# Altium PCB PCB1.PcbDoc (part 2 of 2)
Units mil, origin at the board's own origin, x right, y up, seen from the top; angles counter-clockwise.
Board outline 5020 x 3185 mil, 4 copper layers (Top Layer, GND, VCC, Bottom Layer), stack 23.756 mil thick; 166 components, 117 nets, 551 pads, 495 vias.
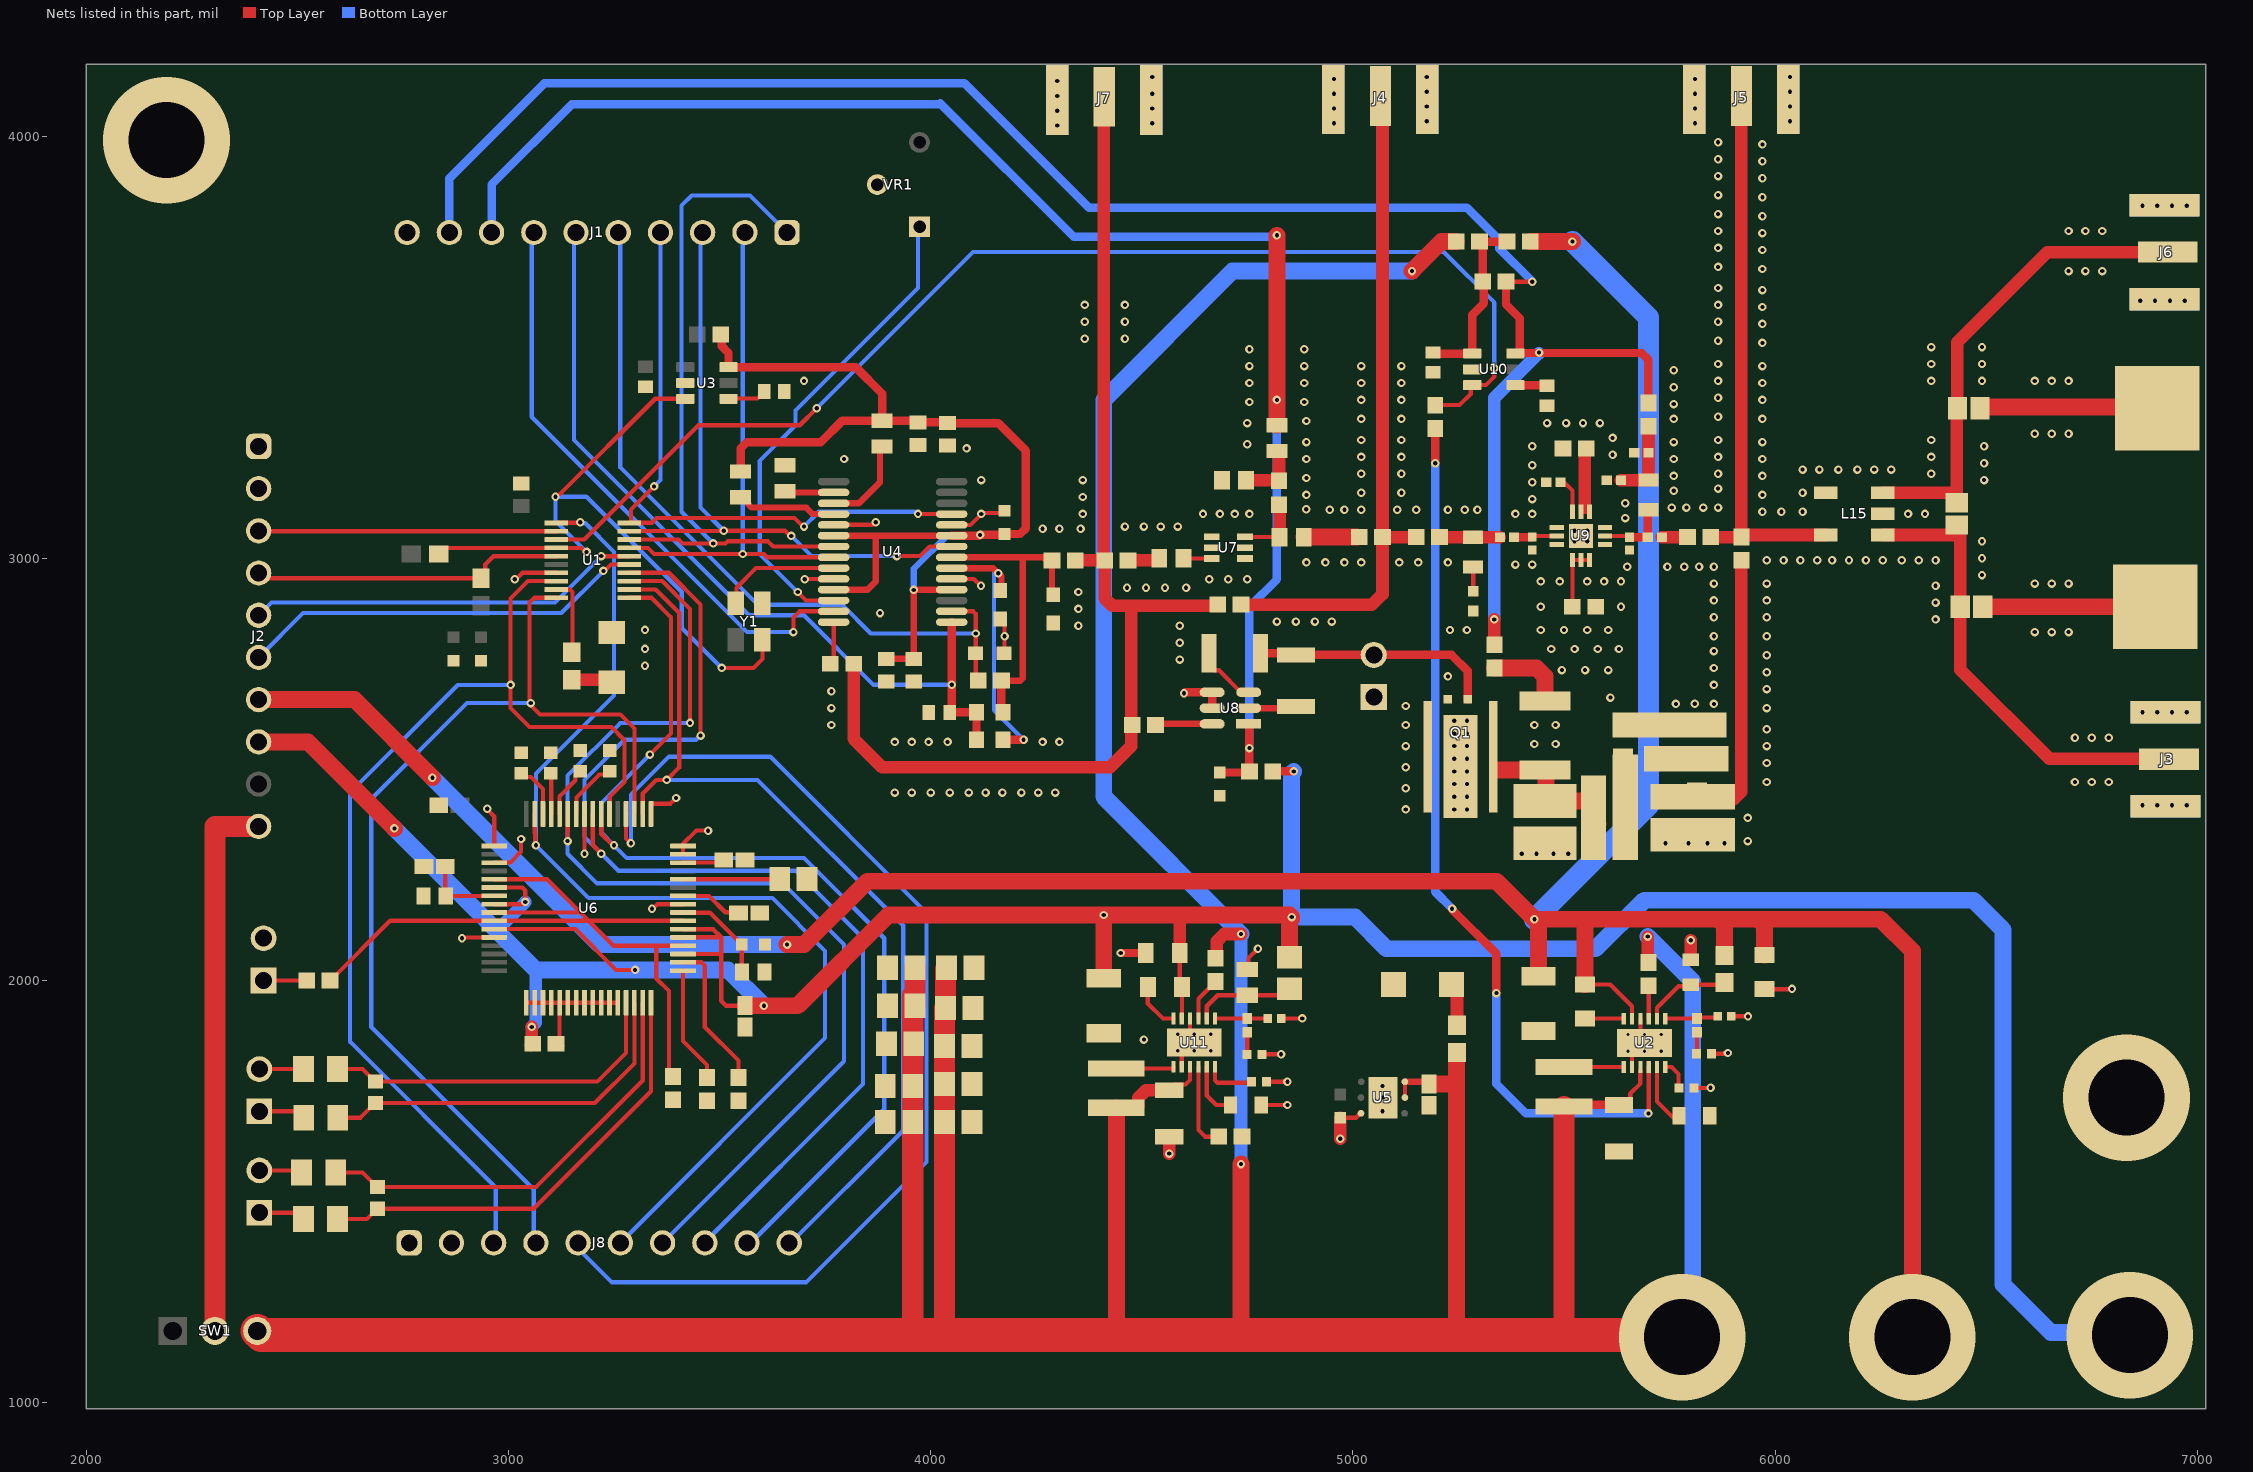
[diagram p2: the nets of this part, all layers, seen from the top]

## Via types
v1: diameter 20, hole 10, Top Layer to Bottom Layer, tented both sides, 477 vias
v2: diameter 19.68, hole 7.87, Top Layer to Bottom Layer, 12 vias
v3: diameter 300, hole 180, Top Layer to Bottom Layer, 6 vias

## Nets (pads, with @x,y where several pads share a name; then routed paths per layer and width w, separated by ;. In a path a pad name is that pad's centre, name@x,y a point inside that pad or via, vN(x,y) a via of type N, cw(c..) or ccw(c..) an arc to the next point about the centre after c; other vN are vias at no path point) (continued)
3V3DDS: C13.2 C14.2 C15.2 C16.2 C17.2 R12.1 R22.2 R23.2 U3.6 U4.6 U4.11 U4.18 U4.23 | length 2740.6
  Top Layer w10: C16.2@3960,2761.57 3958.44,2761.57 C16.2@3960,2763.13 ; v1(3960,2925) v1@3960.22,2925.22 ; U4.18@4049.55,2925.22 U4.18@4049.76,2925.43
  Top Layer w15: U4.11@3770.24,2925.43 3850.43,2925.43 3870,2945 3870,3053.39 ; U4.6@3770.24,3053.39 3870,3053.39 ; C13.2@3895,2761.57 C16.2@3958.44,2761.57 ; C16.2@3960,2763.13 v1(3960,2925) ; v1@3960.22,2925.22 U4.18@4049.55,2925.22 ; U4.23@4049.76,3053.39 3870,3053.39
  Top Layer w20: R12.1@3505.61,3527 3505.61,3502 3521.18,3486.42 U3.6@3521.18,3452.4 3822.6,3452.4 3885,3390 R23.2@3885,3325.59 ; R22.2@3550,3205.59 3550,3260 3565,3275 3740,3275 3790.59,3325.59 R23.2@3885,3325.59 ; U4.23@4049.76,3053.39 v1@4115.42,3053.39 ; v1(4117.13,3055.1) 4172.66,3055.1 C17.2@4175,3057.44 4211.87,3057.44 4225.23,3070.81 4225.23,3254.77 4160,3320 C14.2@4040,3320 4038.43,3321.57 C15.2@3970,3321.57 3965.98,3325.59 R23.2@3885,3325.59
  Bottom Layer w15: v1(3960,2925) 3960,2975 4040.1,3055.1 v1(4117.13,3055.1)
3V7PA: L10.2 R42.1 | length 186.6
  Top Layer w40: R42.1@5335.24,2740.04 5434.96,2740.04 5455,2720 L10.2@5455,2661.5
5V0: C25.1 C49.1 C50.1 C51.1 J2.8 R15.2 R25.2 R49.2 U6.19 U6.21 U6.22 U6.54 U6.56 U6.59 U11.11 | length 8041.5
  Top Layer w10: U6.59@2966.38,2121.57 3158.43,2121.57 3255,2025 v1(3300,2025) ; U6.56@2966.38,2180.63 3031.98,2180.63 3037.29,2185.94 v1(3040,2185.94) ; U6.54@2966.38,2220 3032.57,2220 3040,2212.57 v1(3040,2185.94) ; v1@3040,2185 v1(3040,2185.94) ; R25.2@3052.4,1845 R25.2@3057.4,1850 ; U6.19@3413.62,2062.52 3503.88,2062.52 ; U6.22@3413.62,2121.57 3414.13,2121.06 3485,2121.06 3503.88,2102.18 ; U6.21@3413.91,2102.18 3503.88,2102.18 ; C25.1@3560,1940 3515,1940 3503.88,1951.12 3503.88,2062.52 ; C51.1@4590,2065 4590,1990 C49.1@4595,1985 4595,1919.02 4594.69,1918.7 U11.11@4594.69,1910 ; 3503.88,2062.52 3503.88,2102.18
  Top Layer w20: R15.2@4810.2,2495 v1(4860,2495)
  Top Layer w30: R25.2@3052.59,1846.14 3055,1848.54 v1(3055,1890) ; C51.1@4590,2065 4590,2155
  Top Layer w40: J2.8@2408.51,2565 2525,2565 v1(2730,2360) ; C25.1@3560,1940 3685.18,1940 3900.18,2155 v1(4410,2155) ; C50.1@4410,2004.96 v1(4410,2155) ; R49.2@4850,2061.59 4850,2141.59 4855,2146.59 v1(4855,2150) 4850,2155 4590,2155 v1(4410,2155)
  Bottom Layer w10: 2975,2115 2975,2120.94
  Bottom Layer w30: 2975,2120.94 v1(3040,2185.94) ; v1(3055,1890) 3065,1900 3065,2025
  Bottom Layer w40: v1(2730,2360) 2975,2115 3065,2025 v1(3300,2025) 3520,2025 v1(3605,1940) ; v1(4860,2495) 4855,2490 v1(4855,2150) 5005,2150 5080,2075 5575,2075 5690,2190 6470,2190 6540,2120 6540,1280 6653.43,1166.57 6833.43,1166.57 v3(6840,1160)
12V0: C4.1 C5.1 C6.1 J2.7 R3.2 R9.2 U2.11 | length 7742.9
  Top Layer w10: C4.1@5550,1990.35 5609.65,1990.35 5661.26,1938.74 U2.11@5661.26,1909.17 ; 5555,2140 5560,2145 ; C6.1@5970.71,2064.29 C6.1@5975,2060
  Top Layer w40: J2.7@2408.51,2665 2635,2665 v1(2820,2480) ; v1(3660,2085) 3700,2085 3850,2235 5340,2235 v1(5430,2145) ; R9.2@5420.2,3750 v1(5520,3750) ; C5.1@5440,2009.96 5440,2135 v1(5430,2145) ; C4.1@5550,1990.35 5550,2135 5555,2140 ; R3.2@5880,2059.2 5880,2130 5865,2145 ; C6.1@5975,2060 5975,2130 5960,2145 ; v3(6325,1155) 6325,2070 6250,2145 5960,2145 ; v1(5430,2145) 5560,2145 5865,2145 ; 5865,2145 5960,2145
  Bottom Layer w40: v1(2820,2480) 3215,2085 v1(3660,2085)
  Bottom Layer w50: v1(5430,2145) 5700,2415 5700,3570 v1(5520,3750)
12V0PA: C36.2 C38.2 L3.2 R41.1 | length 192.1
  Top Layer w10: L3.2@5699.57,3185 L3.2@5700,3185.43
  Top Layer w30: C36.2@5635,3185 L3.2@5699.57,3185 ; L3.2@5700,3185.43 C38.2@5700,3250 R41.1@5700,3312.4
AFE_AGND: R56.1 R57.2 U6.20 U6.23 U6.53 U6.57 U6.58 | length 1911.6
  Top Layer w10: R56.1@2577.6,2000 2578.54,2000 2719.8,2141.26 U6.58@2966.38,2141.26 3190,2141.26 ; U6.57@2966.38,2160.94 3170.31,2160.94 ; U6.53@2966.38,2239.68 3091.57,2239.68 3170.31,2160.94 ; 3380,1794.01 3380,1975 3350,2005 3350,2082.2 ; U6.20@3413.62,2082.2 3350,2082.2 ; U6.23@3413.62,2141.26 3190,2141.26 ; 3170.31,2160.94 3190,2141.26 ; 3190,2141.26 3249.06,2082.2 3350,2082.2
AFE_RST: J8.5 U6.36 | length 2669.1
  Top Layer w10: U6.36@3279.09,2394.92 U6.36@3278.58,2394.41 3278.58,2336.42 v1(3290,2325)
  Bottom Layer w10: J8.5@3149.14,1380.88 3180.01,1350.01 3245,1285 3705,1285 3990,1570 3990,2160 3620,2530 3380,2530 3290,2440 v1(3290,2325)
"ClassE VG": J9.2 Q1.2 R39.2 R40.2 | length 575.5
  Top Layer w10: R39.2@4861.02,2775 R39.2@4865,2771.02
  Top Layer w20: R40.2@4781.02,2775 R39.2@4861.02,2775 ; R39.2@4865,2771.02 5233.98,2771.02 5271.93,2733.07 Q1.2@5271.93,2665.83
CS: J8.9 U1.11 U6.39 | length 2432.1
  Top Layer w10: U6.39@3219.53,2394.41 3219.76,2394.17 3219.76,2347.53 3247.29,2320 v1(3250,2320) ; U1.11@3286.5,2906.42 3338.58,2906.42 3385,2860 3385,2585 v1(3335,2535)
  Bottom Layer w10: v1(3335,2535) 3220,2420 3220,2350 v1(3250,2320) 3280,2290 3700,2290 3890,2100 3890,1695 J8.9@3558.44,1363.44
D7: J1.4 U1.20 U4.25 | length 1509
  Top Layer w10: U1.20@3286.5,3083.58 3287,3084.08 U1.20@3290,3084.08 ; v1(3345,3170) 3290,3115 U1.20@3290,3084.08 ; v1@3699.61,3075 3697.72,3075 3677.72,3095 3350.92,3095 3340,3084.08 U1.20@3290,3084.08 ; v1(3970,3105) 3970.22,3104.78 4049.55,3104.78 U4.25@4049.76,3104.57
  Bottom Layer w10: v1(3345,3170) 3360,3185 J1.4@3360,3771.49 ; v1(3700,3075) 3735,3110 3962.29,3110 3967.29,3105 v1(3970,3105)
DDS_OUT: R16.2 R17.1 R19.1 R21.2 U4.21 | length 730.7
  Top Layer w10: R19.1@4167.6,2638.89 R19.1@4171.5,2635
  Top Layer w15: U4.21@4049.76,3002.2 4217.8,3002.2 ; R21.2@4167.6,2710 4211.94,2710 4217.8,2715.86 4217.8,3002.2 ; R16.2@4275,2993.42 4266.21,3002.2 4217.8,3002.2 ; R17.1@4282.95,2910.59 4287.4,2915.04 R16.2@4287.4,2995
  Top Layer w20: R19.1@4167.6,2638.89 R21.2@4167.6,2710
DDS_OUTB: R18.1 R20.1 U4.20 | length 637.6
  Top Layer w15: U4.20@4049.76,2976.61 4148.39,2976.61 v1@4160.23,2964.77 ; v1(4160,2964.41) 4167.69,2956.71 R18.1@4167.69,2917.9
  Top Layer w20: R20.1@4171.5,2570 v1(4220,2570)
  Bottom Layer w10: 4150,2965 4150,2640 v1(4220,2570)
DDS_RST: J1.3 U1.19 U4.22 | length 1522.1
  Top Layer w10: U1.19@3286.5,3063.9 3287,3064.4 3509.4,3064.4 v1(3510,3065) 3655.09,3065 3667.29,3052.8 v1(3670,3052.8) ; v1(3920,3005) 3975,3005 3997.8,3027.8 U4.22@4049.76,3027.8
  Bottom Layer w10: J1.3@3455,3766.3 3455,3120 v1(3510,3065) ; v1(3670,3052.8) 3717.8,3005 v1(3920,3005)
DDS_WCLK: J1.1 U1.18 U4.7 | length 1624.4
  Top Layer w10: U1.18@3286.5,3044.21 3403.08,3044.21 3412.29,3035 3513.85,3035 3518.85,3040 3615,3040 3627.2,3027.8 U4.7@3770.24,3027.8
  Bottom Layer w10: 3410,3780.8 3410,3785.02 3410,3835 3434.11,3859.11 3572.39,3859.11 J1.1@3660,3771.49 ; 3410,3783.18 3410,3110 v1(3485,3035)
DRDY: J8.6 U1.1 U6.47 | length 2708.8
  Top Layer w10: U6.47@3062.05,2394.41 3062.05,2348.98 3063.6,2347.43 3063.6,2321.4 v1(3065,2320) ; U1.1@3113.5,3083.58 3114,3084.08 3169.08,3084.08 v1(3170,3085)
  Bottom Layer w10: v1(3170,3085) 3171.91,3083.09 3181.91,3083.09 3250,3015 3250,2675 3065,2490 v1(3065,2320) 3190,2195 3625,2195 3750,2070 3750,1863.51 J8.6@3254.72,1368.22
"Electrode 1": L14.2 pad.2@6900,2885 | length 353.8
  Top Layer w40: L14.2@6488.88,2882.28 L14.2@6491.61,2885 pad.2@6841.55,2885
"Electrode 2": L17.1 pad.2@6905,3355 | length 349.9
  Top Layer w40: L17.1@6497.73,3357.72 pad.2@6847.67,3357.72
FQ_UD: J1.2 U1.17 U4.8 | length 1254.5
  Top Layer w10: U1.17@3286.5,3024.53 3330.47,3024.53 3345,3010 3605,3010 3612.8,3002.2 U4.8@3770.24,3002.2
  Bottom Layer w10: v1(3555,3010) J1.2@3555,3771.49
GND: C1.1 C2.1 C3.1 C5.2 C6.2 C7.1 C9.2 C10.2 C11.1 C12.1 C13.1 C14.1 C15.1 C16.1 C17.1 C18.2 C19.2 C20.1 C21.2 C22.2 C25.2 C26.2 C27.2 C28.2 C29.1 C30.1 C31.2 C32.2 C35.2 C36.1 C37.1 C38.1 C41.1 C42.1 C43.1 C45.1 C47.1 C48.1 C50.2 C51.2 C52.1 C54.2 C55.2 C61.2 C62.2 C63.2 C64.2 C65.2 C66.2 C67.2 C68.2 C69.2 C70.2 D1.1 D2.1 J1.10 J2.1 J2.2 J3.2 J3.3 J3.4 J3.5 J4.2 J4.3 J4.4 J4.5 J5.2 J5.3 J5.4 J5.5 J6.2 J6.3 J6.4 J6.5 J7.2 J7.3 J7.4 J7.5 J8.1 J8.2 J9.1 L15.2 L15.5 P3.2 pad.2@5455,2325 pad.2@5805,2345 Q1.3 Q1.4 Q1.5 R5.2 R6.1 R7.1 R8.1 R17.2 R18.2 R24.2 R26.2 R27.2 R28.2 R30.2 R47.1 R51.1 R52.1 R53.1 R57.1 R58.1 R59.1 R60.1 U1.7 U2.2 U2.10 U2.13 U3.2 U4.5 U4.10 U4.19 U4.24 U5.3 U5.7 U6.25 U6.31 U6.32 U6.33 U6.41 U6.49 U6.51 U6.60 U7.1 U7.2 U7.4 U7.5 U8.4 U8.5 U9.1 U9.3 U9.7 U9.9 U9.13 U10.2 U11.2 U11.10 U11.13 VR1.2 Y1.2 | length 2279.3
  Top Layer w10: v1(2890,2100) 2891.89,2101.89 U6.60@2966.38,2101.89 ; v1@2950,2405 2966.38,2388.62 U6.49@2966.38,2318.43 ; U6.51@2966.38,2279.06 2966.89,2279.57 3004.57,2279.57 3030,2305 v1(3030,2335) ; v1(3015,2950) 3017.71,2950 3033.18,2965.47 U1.7@3113.5,2965.47 ; v1(3180.16,2300.16) U6.41@3180.16,2394.41 ; U6.33@3337.64,2394.41 3337.64,2418.23 3338.15,2418.74 3383.74,2418.74 v1@3395,2430 ; v1(3340,2170) 3342.71,2170 3353.34,2180.63 U6.25@3413.62,2180.63 ; U6.31@3413.62,2298.74 U6.32@3413.62,2318.43 3413.62,2323.62 3445,2355 v1@3465,2355 ; v1@3700,2950 3701.02,2951.02 U4.10@3770.24,2951.02 ; U4.5@3770.62,3079.36 3861.65,3079.36 3867.29,3085 v1(3870,3085) ; U4.19@4049.76,2951.02 4102.17,2951.02 4118.19,2935 v1(4119.25,2935) ; U4.24@4049.76,3078.98 4093.98,3078.98 v1(4120,3105) 4121.91,3106.91 4169.35,3106.91 C17.1@4175,3112.56 ; R18.2@4155,2855.16 4163.66,2855.16 4175,2843.82 v1(4175,2815) 4175,2776.54 R5.2@4173.46,2775 ; U11.2@4594.69,1795.83 4594.69,1824.45 4623.15,1852.91 U11.13@4624.21,1852.91 4614.37,1862.76 U11.10@4614.37,1910 ; R52.1@4750,2026.11 4753.09,2029.2 4753.09,2053.09 v1(4775,2075) ; C55.2@4782.83,1705 v1(4845,1705) ; R53.1@4785,1825 v1(4830,1825) ; R51.1@4795,1760 v1(4845,1760) ; C54.2@4830,1910 v1(4880,1910) ; C20.1@4970,1674.88 5007.23,1674.88 5017.55,1685.2 U5.3@5019.16,1685.2 ; U2.2@5661.26,1795 5661.26,1823.62 5689.72,1852.09 U2.13@5690.79,1852.09 5680.94,1861.93 U2.10@5680.94,1909.17 ; R6.1@5807.72,1745 v1@5845,1745 ; R8.1@5851.5,1828.78 R8.1@5848.98,1826.26 5886.26,1826.26 v1(5888.13,1828.13) v1@5890,1830 ; C9.2@5895.75,1915 v1@5935,1915 ; C6.2@5975,1979.29 6039.29,1979.29 v1(6040,1980)
  Top Layer w20: v1(4450,2065) C51.2@4509.29,2065 ; v1(4600,2680) 4602.4,2682.4 U8.4@4666.67,2682.4 U8.5@4666.67,2645
  Top Layer w30: v1(4565,1590) C52.1@4565,1629.88 ; v1@4970,1625 C20.1@4970,1674.88 ; R7.1@5800,2049.06 v1(5800,2095)
  other v1: 4970.07,1625.16 5070,1690 5071.18,1722.6 5847.08,1745.75 5070,1750 4505,1860 5935.86,1914.92 5400,2300 5435,2300 5475,2300 5510,2300 5740.25,2324.88 5795,2325 5840,2325 5880,2325 5935,2330 3472.84,2354.75 5935,2385 5125,2405 5240,2405 5270,2405 2949.88,2406.77 6870,2415 6905,2415 6940,2415 6975,2415 3397,2432.15 5240,2435 5270,2435 3915,2445 3955,2445 4000,2445 4045,2445 4090,2445 4130,2445 4170,2445 4215,2445 4255,2445 4295,2445 5125,2455 5240,2465 5270,2465 5980,2470 6710,2470 6750,2470 6790,2470 5240,2495 5270,2495 5125,2505 5980,2515 5240,2525 5270,2525 5125,2555 5240,2555 5270,2555 5980,2555 5430,2560 5480,2560 3915,2565 3955,2565 3995,2565 4040,2565 4265,2565 4305,2565 6710,2575 6750,2575 6790,2575 5240,2585 5270,2585 5980,2595 3765,2605 5125,2605 5430,2605 5480,2605 5240,2615 5270,2615 6870,2635 6905,2635 6940,2635 6975,2635 3765,2645 5980,2645 5125,2650 5765,2655 5809.78,2655.38 5855,2655 5610,2670 3765,2685 5980,2690 5855,2700 5225,2720 5980,2730 5495,2735 5550,2735 5605,2735 5855,2740 3323.36,2745.19 4590,2760 5980,2770 5855,2780 3323.36,2785.19 5470,2785 5525,2785 5580,2785 5630,2785 4590,2800 5855,2815 5980,2815 6615,2825 6655,2825 6695,2825 3323.36,2830.19 5230,2830 5270,2830 5445,2830 5500,2830 5555,2830 5605,2830 4350,2840 4590,2840 4820,2850 4865,2850 4910,2850 4950,2850 6380,2855 5855,2860 5980,2860 3880,2870 4350,2880 5445,2885 5635,2885 6380,2895 5855,2900 5980,2900 4350,2920 4465,2930 4510,2930 4555,2930 4605,2930 6380,2935 5855,2940 5980,2940 6615,2940 6655,2940 6695,2940 5445,2945 5490,2945 5555,2945 5595,2945 5635,2945 3701.69,2950.2 4660,2950 4705,2950 4750,2950 6490,2960 5650,2980 5745,2980 5785,2980 5820,2980 5855,2980 5385,2985 5425,2985 4890,2990 4935,2990 4980,2990 5020,2990 5110,2990 5155,2990 5225,2990 5980,2995 6020,2995 6060,2995 6100,2995 6135,2995 6175,2995 6215,2995 6255,2995 6300,2995 6340,2995 6380,2995 6490,3000 5525,3040 5555,3040 6490,3040 5525,3065 5555,3065 4265,3070 4305,3070 4355,3070 4460,3075 4505,3075 4545,3075 4585,3075 5645,3095 4360,3105 4645,3105 4685,3105 4720,3105 4755,3105 5385,3105 5425,3105 6315,3105 6355,3105 5970,3110 6015,3110 6065,3110 4945,3115 4980,3115 5020,3115 5105,3115 5150,3115 5225,3115 5265,3115 5295,3115 4889.38,3115.75 5755,3120 5790,3120 5830,3120 5865,3120 5645,3130 5425,3140 4360,3145 4890,3150 5970,3150 5020,3155 5115,3155 6065,3155 5760,3160 5865,3165 5425,3180 4120,3185 4360,3185 6495,3185 4890,3190 5760,3195 5970,3195 5020,3200 5115,3200 5865,3200 6370,3200 6065,3210 6105,3210 6150,3210 6195,3210 6235,3210 6275,3210 5425,3220 6495,3225 3795,3235 4890,3235 5760,3235 5970,3235 5020,3240 5115,3240 5865,3240 6370,3240 5615,3245 4085,3260 5425,3265 6495,3265 4750,3270 4890,3275 5760,3275 5970,3275 5020,3280 5115,3280 5865,3280 6370,3280 5615,3285 6615,3295 6655,3295 6695,3295 4750,3320 5460,3320 5505,3320 5545,3320 5585,3320 4890,3325 5020,3330 5115,3330 5760,3330 5970,3330 5865,3335 5760,3365 4755,3370 4885,3370 5020,3375 5115,3375 5970,3375 5865,3380 5760,3405 4755,3415 4885,3415 5020,3415 5115,3415 5970,3415 3700,3420 5865,3420 6370,3420 6490,3420 6615,3420 6655,3420 6695,3420 5760,3445 4755,3455 4885,3455 5020,3455 5115,3455 5970,3455 5865,3460 6370,3460 6490,3460 4755,3495 4885,3495 6370,3500 6490,3500 5970,3510 5865,3515 4365,3520 4460,3520 5970,3555 4365,3560 4460,3560 5865,3560 5970,3595 4365,3600 4460,3600 5865,3600 6865,3610 6900,3610 6935,3610 6970,3610 5970,3635 5865,3640 6695,3680 6735,3680 6775,3680 5970,3685 5865,3690 5970,3730 5865,3735 5970,3770 5865,3775 6695,3775 6735,3775 6775,3775 5970,3810 5865,3815 6870,3835 6905,3835 6940,3835 6975,3835 5970,3855 5865,3860 5970,3900 5865,3905 5970,3940 5865,3945 5970,3980 5865,3985 4300,4025 4525,4030 4955,4030 5810,4030 5175,4035 6035,4035 4300,4060 4525,4065 4955,4065 5810,4065 5175,4070 6035,4070 4300,4095 4525,4100 4955,4100 5810,4100 5175,4105 6035,4105 4300,4130 4955,4135 5810,4135 4525,4140 5175,4140 6035,4140
  other v2: 5651.42,1832.4 5690.79,1832.4 5730.16,1832.4 4584.84,1833.23 4624.21,1833.23 4663.58,1833.23 5651.42,1871.77 5690.79,1871.77 5730.16,1871.77 4584.84,1872.6 4624.21,1872.6 4663.58,1872.6
  other v3: 6832.28,1722.28 2190,3990
MCU_RST: J2.4 R2.1 U1.5 | length 758.1
  Top Layer w10: J2.4@2396.06,2952.56 R2.1@2935,2952.56 2945,2952.56 2945,2985 2964.84,3004.84 U1.5@3113.5,3004.84
MISO: J8.7 U1.13 U6.43 | length 2660.9
  Top Layer w10: v1(3140,2330) 3140,2355 3140.28,2355.28 3140.28,2393.9 U6.43@3140.79,2394.41 ; U1.13@3286.5,2945.79 3364.21,2945.79 3430,2880 v1(3430,2610)
  Bottom Layer w10: J8.7@3365,1378.51 3795,1808.51 3795,2085 3650,2230 3210,2230 3140,2300 v1(3140,2330) 3140,2485 3265,2610 v1(3430,2610)
MOSI: J8.10 U1.12 U6.34 | length 2239.3
  Top Layer w10: U1.12@3286.5,2926.1 3348.9,2926.1 3404.28,2870.72 3404.28,2504.28 v1(3375,2475) 3350,2475 3317.95,2442.95 U6.34@3317.95,2394.41
  Bottom Layer w10: v1(3375,2475) 3590,2475 3935,2130 3935,1645 J8.10@3663.51,1373.51
NetC4_2: C4.2 U2.12 | length 92
  Top Layer w10: C4.2@5550,1909.65 5641.5,1909.65 5641.57,1909.57 U2.12@5641.57,1909.17
NetC8_1: C8.1 C9.1 U2.7 | length 126.9
  Top Layer w10: U2.7@5740,1909.17 5740,1909.51 5740.08,1909.59 5814.59,1909.59 C8.1@5815,1910 5817.5,1912.5 5861.75,1912.5 C9.1@5864.25,1915
NetC8_2: C8.2 R8.2 | length 49.5
  Top Layer w10: R8.2@5815,1827.72 C8.2@5815,1877.2
NetC10_1: C10.1 U2.5 | length 143.9
  Top Layer w10: U2.5@5720.31,1795 5720.31,1713.19 C10.1@5764.25,1669.25
NetC12_2: C12.2 U3.4 | length 92.3
  Top Layer w10: U3.4@3521.18,3377.6 3521.77,3378.19 3589.8,3378.19 3593.9,3382.28 3596.61,3382.28 3603.11,3388.78 C12.2@3603.11,3394.49
NetC21_1: C21.1 C22.1 U6.55 | length 185.4
  Top Layer w10: C22.1@2850.22,2270 2850.22,2201.36 C21.1@2851.57,2200 ; C21.1@2851.57,2200.32 U6.55@2966.38,2200.32
NetC23_1: C23.1 R29.2 U6.13 | length 842.2
  Top Layer w10: R29.2@2595.35,1790 2654.61,1790 2684.02,1760.59 C23.1@2685,1760.59 3210.59,1760.59 3278.58,1828.58 U6.13@3278.58,1947.17
NetC23_2: C23.2 R31.2 U6.14 | length 899.6
  Top Layer w10: R31.2@2595.71,1675 2649.61,1675 2684.02,1709.41 C23.2@2685,1709.41 3204.41,1709.41 3298.27,1803.27 U6.14@3298.27,1947.17
NetC24_1: C24.1 R32.2 U6.15 | length 1030.2
  Top Layer w10: R32.2@2590.71,1545 2654.61,1545 2689.02,1510.59 C24.1@2690,1510.59 3065.59,1510.59 3317.95,1762.95 U6.15@3317.95,1947.17
NetC24_2: C24.2 R33.2 U6.16 | length 1077.2
  Top Layer w10: R33.2@2595.35,1435 2664.61,1435 2689.02,1459.41 C24.2@2690,1459.41 3059.41,1459.41 3337.64,1737.64 U6.16@3337.64,1947.17
NetC27_1: C27.1 U6.30 | length 98.8
  Top Layer w10: U6.30@3413.62,2279.06 3504.06,2279.06 C27.1@3510,2285
NetC28_1: C28.1 U6.28 | length 228.9
  Top Layer w10: U6.28@3413.62,2239.68 C28.1@3642.49,2239.68
NetC31_1: C31.1 U6.26 | length 147.9
  Top Layer w10: U6.26@3413.62,2200.32 3474.69,2200.32 3513.38,2161.63 3543.16,2161.63 C31.1@3544.78,2160
NetC32_1: C32.1 L2.2 R34.1 | length 150.8
  Top Layer w10: R34.1@4820,3253.82 R34.1@4825,3248.82 ; L2.2@4823.58,3185 L2.2@4825,3183.58
  Top Layer w30: C32.1@4747.09,3185 L2.2@4823.58,3185 ; L2.2@4825,3183.58 R34.1@4825,3248.82
NetC33_1: C33.1 L2.1 U7.6 | length 152.1
  Top Layer w10: U7.6@4744.37,3050.59 C33.1@4819.41,3050.59 ; L2.1@4825,3126.42 L2.1@4826.46,3124.97
  Top Layer w30: C33.1@4826.46,3050 L2.1@4826.46,3124.97
NetC33_2: C33.2 R35.2 | length 126.5
  Top Layer w40: C33.2@4883.54,3050 R35.2@5010,3050
NetC34_1: C34.1 R36.1 | length 75.9
  Top Layer w10: C34.1@4536.46,2995 C34.1@4541.46,3000
  Top Layer w30: R36.1@4467.6,2995 C34.1@4536.46,2995
NetC34_2: C34.2 U7.3 | length 67.3
  Top Layer w10: C34.2@4598.54,3000 4599.13,2999.41 U7.3@4665.63,2999.41
NetC37_2: C37.2 U9.12 | length 77.4
  Top Layer w10: C37.2@5500.62,3179.38 5519.92,3160.08 5519.92,3110.08 U9.12@5519.84,3110
NetC39_1: C39.1 L4.2 R43.1 | length 143.1
  Top Layer w30: R43.1@5205,3050 L4.2@5285,3050 C39.1@5348.13,3050
NetC39_2: C39.2 C42.2 U9.2 | length 102.2
  Top Layer w10: C39.2@5381.87,3050 C39.2@5382.05,3050.18 ; C42.2@5424.82,3050.18 5427.56,3052.91 U9.2@5482.83,3052.91
  Top Layer w20: C39.2@5382.05,3050.18 C42.2@5424.82,3050.18
NetC40_1: C40.1 C41.2 L3.1 U9.8 | length 167.7
  Top Layer w10: U9.8@5597.01,3052.91 5652.09,3052.91 C41.2@5655,3050 ; L3.1@5698.13,3112.69 L3.1@5700,3114.57
  Top Layer w20: C41.2@5655,3050 C40.1@5698.13,3050 L3.1@5698.13,3112.69
NetC40_2: C40.2 R44.2 | length 60.5
  Top Layer w30: C40.2@5731.87,3050 R44.2@5792.4,3050
NetC43_2: C43.2 L7.2 pad.2@5805,2435 R46.1 | length 600.1
  Top Layer w30: pad.2@5875,2429.61 5902.43,2429.61 5920,2447.18 R46.1@5920,2995
NetC45_2: C45.2 C59.2 L10.1 pad.2@5455,2425 pad.2@5570,2385 Q1.1 | length 379.2
  Top Layer w30: pad.2@5570,2385 5578.04,2377.52 5585.39,2370.68 pad.2@5570.39,2355.68
  Top Layer w40: 5342.72,2498.5 L10.1@5455,2498.5 5457.44,2496.06 5457.44,2427.44 pad.2@5455,2425 5560,2425 5570,2415 pad.2@5570,2385
NetC47_2: C47.2 R9.1 R10.1 R11.2 U10.1 | length 423.2
  Top Layer w20: C47.2@5190,3487.24 5192.44,3484.8 U10.1@5282.64,3484.8 5282.64,3576.18 5310,3603.54 R11.2@5310,3640 ; R11.2@5307.4,3655 5307.4,3742.6 R10.1@5300,3750 5307.4,3750 R9.1@5365,3750
NetC48_2: C48.2 U10.4 | length 73.6
  Top Layer w20: U10.4@5385,3410 C48.2@5458.62,3410
NetC49_2: C49.2 U11.12 | length 114.8
  Top Layer w10: C49.2@4514.29,1985 4514.29,1945.71 4550,1910 U11.12@4575,1910
NetC53_1: C53.1 C54.1 U11.7 | length 125.1
  Top Layer w10: U11.7@4673.43,1910 C53.1@4750,1910 C54.1@4798.5,1910
NetC53_2: C53.2 R53.2 | length 44.5
  Top Layer w10: R53.2@4750,1832.72 C53.2@4750,1877.2
NetC55_1: C55.1 U11.5 | length 133.8
  Top Layer w10: U11.5@4653.74,1795.83 4653.74,1727.68 4676.42,1705 C55.1@4710,1705
NetC59_1: C59.1 L5.1 pad.2@5645,2410 | length 7.1
  Top Layer w10: C59.1@5634.21,2385 pad.2@5639.21,2380
NetD1_2: D1.2 R50.1 | length 97.7
  Top Layer w10: D1.2@3238.5,2712.44 D1.2@3245,2705.94
  Top Layer w30: R50.1@3150,2712.44 D1.2@3238.5,2712.44
NetD2_2: D2.2 R55.1 | length 92.6
  Top Layer w10: D2.2@5233.9,1990 D2.2@5235.44,1991.55
  Top Layer w30: R55.1@5246.55,1894.18 D2.2@5246.55,1984.56
NetJ2_10: J2.10 SW1.2 | length 1303
  Top Layer w50: SW1.2@2305,1165.53 2305,2365 J2.10@2408.51,2365
NetJ3_1: J3.1 L14.1 L15.3 L16.2 | length 1093
  Top Layer w30: L15.3@6255.04,3055 6438.88,3055 ; L14.1@6438.39,2885 6438.39,2736.61 6650,2525 J3.1@6925.94,2525 ; L14.1@6438.88,2894.47 6438.88,3055 ; L16.2@6438.88,3080 6438.88,3055
NetJ4_1: J4.1 R35.1 R43.2 R54.1 | length 1612.9
  Top Layer w10: R43.2@5149.8,3050 R43.2@5150,3049.8
  Top Layer w30: R54.1@4735.2,2890 5045,2890 5070,2915 R35.1@5070,3050 ; J4.1@5070,4102.71 R35.1@5070,3050 ; R43.2@5149.8,3050 R35.1@5070,3050
NetJ5_1: J5.1 L15.4 R44.1 R46.2 | length 1292.3
  Top Layer w10: R46.2@5919.8,3050 R46.2@5920,3050.2 R46.2@5924.8,3055
  Top Layer w30: R44.1@5847.6,3050 R46.2@5919.8,3050 ; R46.2@5920,3050.2 J5.1@5920,4068.03 ; R46.2@5924.8,3055 L15.4@6120,3055
NetJ6_1: J6.1 L15.1 L16.1 L17.2 | length 1144.9
  Top Layer w30: L15.1@6255.04,3155 6430,3155 ; L16.1@6430,3126.61 6430,3160 L17.2@6430,3353.22 ; L17.2@6431.78,3355 6431.78,3511.78 6645,3725 J6.1@6930,3725
NetL1_2: L1.2 U2.1 | length 141.6
  Top Layer w10: L1.2@5500,1795 U2.1@5641.57,1795
NetL4_1: L4.1 R47.2 | length 57.1
  Top Layer w10: R47.2@5285,2922.01 L4.1@5285,2979.13
NetL5_2: L5.2 L6.1 pad.2@5750,2605
NetL6_2: L6.2 L7.1 pad.2@5790,2525
NetL18_2: L18.2 U11.1 | length 139.1
  Top Layer w10: L18.2@4440,1791.65 4574.92,1791.65 4575,1791.73 U11.1@4575,1795.83
NetP1_1: P1.1 R33.1 | length 110.9
  Top Layer w10: P1.1@2410,1450 2499.65,1450 R33.1@2514.65,1435
NetP1_2: P1.2 R32.1 | length 102.1
  Top Layer w10: P1.2@2410,1550 2505,1550 R32.1@2510,1545
NetP2_1: P2.1 R31.1 | length 111.2
  Top Layer w10: P2.1@2410,1690 2500,1690 R31.1@2515,1675
NetP2_2: P2.2 R29.1 | length 104.6
  Top Layer w10: P2.2@2410,1790 R29.1@2514.65,1790
NetP3_1: P3.1 R56.2 | length 102.4
  Top Layer w10: P3.1@2420,2000 R56.2@2522.4,2000
NetR1_2: R1.2 U1.4 U3.3 Y1.1 | length 1668.3
  Top Layer w10: R1.2@2839.92,3019.53 R1.2@2839.92,3019.64 ; R1.2@2844.92,3024.53 U1.4@3113.5,3024.53 3172.77,3024.53 3182.29,3015 v1(3185,3015) ; v1@3115,3145 3115,3146.68 3119.1,3150.79 3120.79,3150.79 3347.6,3377.6 U3.3@3418.82,3377.6 ; v1@3505,2740 3580,2740 3601.5,2761.5 Y1.1@3601.5,2806.69
  Bottom Layer w10: v1@3184.82,3015.18 3111.4,3088.6 v1(3111.4,3145.79) 3184.21,3145.79 3410.29,2919.71 3410.29,2835.03 v1(3505.16,2740.16)
NetR3_1: R3.1 R7.2 U2.8 | length 210.5
  Top Layer w10: U2.8@5720.31,1909.17 5720.31,1935.32 5771.17,1986.17 5796.17,1986.17 R7.2@5800,1990 5875,1990 R3.1@5880,1995
NetR4_2: R4.2 U2.9 | length 72.9
  Top Layer w10: U2.9@5700.63,1909.17 5700.63,1969.13 5706.49,1974.99 R4.2@5711.14,1974.99
NetR6_2: R6.2 U2.6 | length 74.2
  Top Layer w10: U2.6@5740,1795 5755,1795 5771.46,1778.54 5771.46,1750.83 R6.2@5777.28,1745
NetR13_1: R13.1 U4.14 | length 101.9
  Top Layer w10: R13.1@3762.4,2750 3770.24,2757.84 U4.14@3770.24,2848.66
NetR14_1: R14.1 U1.3 U10.3 | length 2906.5
  Top Layer w10: U1.3@3113.5,3044.21 3113.89,3044.61 3179.61,3044.61 3450,3315 3690,3315 v1(3730,3355) ; R14.1@5195,3362.6 5252.6,3362.6 5279.05,3389.05 5279.05,3406.41 U10.3@5282.64,3410 5315,3410 5335,3430 v1(5335,3450)
  Bottom Layer w10: v1(3730,3355) 4100,3725 5215.36,3725 5335,3605.36 v1(5335,3450)
NetR14_2: R14.2 U2.4 | length 2111.7
  Top Layer w10: v1(5700,1685) 5700.55,1685.55 5700.55,1794.92 U2.4@5700.63,1795
  Top Layer w20: v1(5195,3225) R14.2@5195,3307.4 ; v1(5235,2170) 5235,2168.09 5340,2063.09 v1(5340,1970)
  Bottom Layer w20: v1(5195,3225) 5195,2210 v1(5235,2170) ; v1(5340,1970) 5340,1755 5410,1685 v1(5700,1685)
NetR22_1: R22.1 U4.4 | length 240.4
  Top Layer w15: R22.1@3550,3144.41 3557.95,3144.41 3567.35,3135.02 3567.35,3128.79 3576.13,3120 3705,3120 3720.43,3104.57 U4.4@3770.24,3104.57
NetR23_1: R23.1 U4.3 | length 216.9
  Top Layer w10: R23.1@3880,3259.41 R23.1@3885,3264.41
  Top Layer w15: U4.3@3770.24,3130.16 3830.16,3130.16 3880,3180 R23.1@3880,3259.41
NetR24_1: R24.1 U4.2 | length 119.1
  Top Layer w10: R24.1@3655,3165 R24.1@3664.25,3155.75
  Top Layer w15: R24.1@3664.25,3155.75 U4.2@3770.24,3155.75
NetR25_1: R25.1 U6.1 U6.2 U6.3 U6.4 U6.5 U6.6 U6.7 U6.8 U6.9 U6.10 U6.11 U6.12 | length 321.3
  Top Layer w10: U6.1@3042.36,1947.17 U6.2@3062.05,1947.17 U6.3@3081.73,1947.17 U6.4@3101.42,1947.17 U6.5@3121.1,1947.17 ; R25.1@3127.4,1845 3121.1,1851.3 U6.5@3121.1,1947.17 ; U6.12@3258.9,1947.17 U6.11@3239.21,1947.17 U6.10@3219.53,1947.17 U6.9@3199.84,1947.17 U6.8@3180.16,1947.17 U6.7@3160.47,1947.17 U6.6@3140.79,1947.17 U6.5@3121.1,1947.17
NetR26_1: R26.1 U6.46 | length 125.9
  Top Layer w10: R26.1@3030,2490.32 3038.72,2481.6 3053.4,2481.6 3081.73,2453.27 U6.46@3081.73,2394.41
NetR27_1: R27.1 U6.45 | length 81.8
  Top Layer w10: R27.1@3100.53,2490.84 R27.1@3101.42,2489.95 ; U6.45@3101.42,2394.41 3101.42,2474.95
NetR28_1: R28.1 U6.44 | length 121.7
  Top Layer w10: U6.44@3121.1,2394.41 3121.1,2436.1 3159.1,2474.1 3159.1,2485.39 3169.02,2495.32 R28.1@3170,2495.32
NetR30_1: R30.1 U6.42 | length 144
  Top Layer w10: U6.42@3160.47,2394.41 3160.98,2394.92 3160.98,2433.61 3215.28,2487.91 3232.59,2487.91 R30.1@3240,2495.32
NetR37_2: R37.2 U6.17 | length 276.5
  Top Layer w10: U6.17@3413.62,2023.15 3413.62,1856.38 3470,1800 R37.2@3470,1770
NetR38_1: R38.1 U8.6 | length 136.7
  Top Layer w15: R38.1@4530,2607.6 U8.6@4666.67,2607.6
NetR39_1: R39.1 U8.2 | length 113.1
  Top Layer w10: R39.1@4863.98,2650 R39.1@4865,2648.98
  Top Layer w15: U8.2@4753.33,2645 R39.1@4865,2645
NetR40_1: R40.1 U8.3 | length 148.8
  Top Layer w10: R40.1@4658.98,2775 4658.98,2747.44 4671.69,2734.72 4682.59,2734.72 4734.91,2682.4 U8.3@4753.33,2682.4
NetR45_1: R45.1 U6.18 | length 352.8
  Top Layer w10: U6.18@3413.62,2042.83 3457.17,2042.83 3465,2035 3465,1890 3545,1810 R45.1@3545,1770
NetR48_2: R48.2 U11.9 | length 104.9
  Top Layer w10: U11.9@4634.06,1910 4634.13,1910.08 4634.13,1956.53 4660.2,1982.59 4661.14,1982.59 4675,1996.46 R48.2@4675,1997.4
NetR49_1: R49.1 R52.2 U11.8 | length 251.4
  Top Layer w10: U11.8@4653.74,1910 4653.74,1938.74 4680,1965 R52.2@4750,1965 4825.31,1965 4850,1989.69 R49.1@4850,1995
NetR50_2: R50.2 U1.9 | length 183.4
  Top Layer w10: U1.9@3113.5,2926.1 3114,2925.6 3145.64,2925.6 3151.5,2919.74 3151.5,2779.06 R50.2@3150,2777.56
NetR51_2: R51.2 U11.6 | length 123
  Top Layer w10: U11.6@4673.43,1795.83 4673.43,1763.63 4679.28,1757.77 R51.2@4761.79,1757.77
NetR58_2: R58.2 U9.10 U9.11 | length 160.8
  Top Layer w10: U9.11@5539.92,3110 5552.6,3110 U9.10@5560,3110
  Top Layer w30: 5549.43,3120.57 5549.43,3256.83 R58.2@5552.6,3260
NetR59_2: R59.2 U9.4 U9.5 U9.6 | length 151
  Top Layer w10: R59.2@5519.8,2885 R59.2@5519.8,2885 U9.4@5519.84,2995.83 U9.5@5539.92,2995.83 U9.6@5560,2995.83
NetR60_2: R60.2 U11.4 | length 204.8
  Top Layer w10: U11.4@4634.06,1795.83 4634.06,1645.94 4650,1630 R60.2@4682.4,1630
NetU4_9: U4.9 Y1.3 | length 286.9
  Top Layer w10: Y1.3@3538.5,2893.31 3540.01,2894.81 3540.01,2930.01 3586.61,2976.61 U4.9@3770.24,2976.61
NetU4_12: U4.12 VR1.1 | length 1146.2
  Top Layer w10: v1(3685,2920) 3705.16,2899.84 U4.12@3770.24,2899.84
  Bottom Layer w10: v1(3685,2920) 3595,3010 3595,3230 3680,3315 3680,3350 3970,3640 VR1.1@3970,3780
PA1_VDD: C35.1 J1.8 R15.1 R34.2 U8.1 | length 3677.5
  Top Layer w10: R15.1@4752.56,2492.56 R15.1@4755,2495 ; U8.1@4753.33,2607.6 U8.1@4755,2605.92
  Top Layer w20: C35.1@4685,2492.56 R15.1@4752.56,2492.56 ; R15.1@4755,2495 v1(4755,2550.46) U8.1@4755,2605.92
  Top Layer w40: R34.2@4820,3315 v1(4820,3375) v1(4820,3765)
  Bottom Layer w10: 4010.86,4075 4020,4075
  Bottom Layer w20: J1.8@2960,3771.49 2960,3885 3150,4075 4020,4075 ; 4022.5,4077.5 4339.11,3760.89 4815.89,3760.89 v1(4820,3765) ; v1(4755,2550.46) 4755,2885 4820,2950 v1(4820,3375)
PA2_VDD: J1.9 R11.1 R41.2 R42.2 U10.6 | length 4391.7
  Top Layer w10: R11.1@5362.6,3655 v1(5425,3655) ; U10.6@5385,3484.8 U10.6@5388.19,3484.8
  Top Layer w20: R11.1@5362.6,3655 5362.6,3600.94 5395,3568.54 U10.6@5395,3491.61 ; U10.6@5386.31,3486.11 5683.89,3486.11 5700,3470 R41.2@5700,3367.6
  Top Layer w30: R42.2@5335,2795 v1(5335,2855)
  Bottom Layer w20: J1.9@2860,3771.49 2860,3900 3085,4125 4080,4125 4375,3830 5270,3830 5346.54,3753.46 5346.54,3733.46 v1(5425,3655)
  Bottom Layer w30: v1(5335,2855) 5335,3380 v1@5440,3485
  other v1: 5440.9,3487.16
PWDN: J8.4 U1.10 U6.35 | length 2471.4
  Top Layer w10: U1.10@3113.5,2906.42 3061.42,2906.42 3050,2895 3050,2655 3075,2630 3265,2630 3298.27,2596.73 U6.35@3298.27,2394.41
  Bottom Layer w10: v1(3053.07,2656.93) 2901.93,2656.93 2675,2430 2675,1890 3060,1505 J8.4@3060,1373.05
QOUT: J7.1 R13.2 R16.1 R36.2 R38.2 R54.2 | length 2737.8
  Top Layer w10: R36.2@4410,2997.4 R36.2@4412.4,2995 ; R54.2@4677.4,2887.4 R54.2@4680,2890
  Top Layer w30: R13.2@3817.6,2750 3817.6,2572.4 3885,2505 4425,2505 4475,2555 4475,2887.4 ; R16.1@4342.6,2995 R36.2@4412.4,2995 4412.4,2904.97 4429.97,2887.4 4475,2887.4 ; R36.2@4410,2997.4 J7.1@4410,4080 ; R54.2@4677.4,2887.4 4475,2887.4
QOUTB: J1.7 U4.13 | length 1392.3
  Top Layer w10: v1(3675,2825) 3675,2860 3689.25,2874.25 U4.13@3770.24,2874.25
  Bottom Layer w10: J1.7@3055,3759.88 3055,3335 3565,2825 v1(3675,2825)
SCK: J8.8 U1.14 U6.40 | length 2717.5
  Top Layer w10: U6.40@3199.84,2394.41 3199.84,2320.16 v1(3220,2300) ; U1.14@3286.5,2965.47 3379.53,2965.47 3455,2890 v1(3455,2580)
  Bottom Layer w10: J8.8@3453.17,1368.17 3840,1755 3840,2100 3680,2260 3260,2260 v1(3220,2300) 3180,2340 3180,2475 3275,2570 3444.14,2570 3454.14,2580 v1(3455,2580)
SRB1: R37.1
SRB2: R45.2
START: J8.3 U1.8 U6.38 | length 2576.2
  Top Layer w10: U1.8@3113.5,2945.79 3046.14,2945.79 3005,2904.64 v1(3005,2700) 3005,2645 3050,2600 3243.79,2600 3275,2568.79 3275,2470 3239.72,2434.72 3239.72,2394.92 U6.38@3239.21,2394.41
  Bottom Layer w10: J8.3@2970,1373.24 2970,1510 2625,1855 2625,2445 2880,2700 v1(3005,2700)
SWCLK: J2.5 U1.16 | length 936
  Top Layer w10: v1(3220,3005) 3220.08,3004.92 3286.42,3004.92 U1.16@3286.5,3004.84
  Bottom Layer w10: J2.5@2408.51,2865 2438.51,2895 3110,2895 v1(3220,3005)
SWDIO: J2.6 U1.15 | length 969.2
  Top Layer w10: v1(3225,2970) 3227.71,2970 3242.86,2985.16 U1.15@3286.5,2985.16
  Bottom Layer w10: J2.6@2408.51,2765 2513.51,2870 3125,2870 v1(3225,2970)
TXD: J2.3 U1.2 | length 705.5
  Top Layer w10: J2.3@2408.51,3065 2409.61,3063.9 U1.2@3113.5,3063.9
VBAT: C7.2 C19.1 C52.2 C61.1 C62.1 C63.1 C64.1 C65.1 C66.1 C67.1 C68.1 C69.1 C70.1 L1.1 L18.1 R4.1 R10.2 R48.1 R55.2 SW1.3 U2.3 U5.5 U5.6 U11.3 | length 12026
  Top Layer w10: C52.2@4565,1740.12 4578.7,1753.82 4603.82,1753.82 4614.37,1764.37 U11.3@4614.37,1795.83 ; U5.5@5123.21,1722.6 U5.6@5123.21,1760 ; R55.2@5245,1827.52 R55.2@5246.55,1829.06 ; L1.1@5500,1701.69 L1.1@5503.43,1705.12 ; C7.2@5644.88,1705.12 5656.75,1716.99 5656.75,1731.74 5680.87,1755.86 U2.3@5680.87,1786.22 ; R4.1@5698.43,2044.17 R4.1@5700,2042.6
  Top Layer w15: U5.6@5123.21,1760 C19.1@5175,1760
  Top Layer w20: L1.1@5503.43,1705.12 C7.2@5630,1705.12 C7.2@5644.88,1705.12
  Top Layer w30: L18.1@4440,1698.35 4487.64,1698.35 4491.93,1702.64 4491.93,1722.24 4509.5,1739.81 4564.57,1739.81 C52.2@4565,1740.24 ; R48.1@4675,2052.6 4677.48,2055.08 4677.48,2092.43 4695.06,2110 v1(4735,2110) ; R4.1@5698.43,2044.17 v1(5698.43,2103.83)
  Top Layer w40: 4440,1160 L18.1@4440,1698.35 ; 4735,1160 v1(4735,1565) ; v1(5140,3680) 5210,3750 R10.2@5244.8,3750 ; C19.1@5184.2,1755 5245,1755 5245,1160 ; 5245,1760 R55.2@5245,1827.52
  Top Layer w50: 3957.51,1170 C70.1@3957.51,1665 C69.1@3957.51,1750 C67.1@3957.51,1965 ; C67.1@3962.51,1940 C66.1@3962.51,2030 ; 4032.49,1160 4032.49,1632.49 C65.1@4032.49,1665 C64.1@4032.49,1755 C63.1@4032.49,1845 C61.1@4032.49,1935 ; C61.1@4034.98,1935 C62.1@4034.98,2027.49 ; 5500,1160 L1.1@5500,1701.69 ; v3@5775,1160 v3(5780,1155)
  Top Layer w80: SW1.3@2405,1170 2415,1160 4032.49,1160 4440,1160 4735,1160 5245,1160 5500,1160 v3@5775,1160
  Bottom Layer w10: v3(5780,1155) v3@5805,1180
  Bottom Layer w30: v1(4735,1565) v1(4735,2110)
  Bottom Layer w40: v1(4735,2110) 4410,2435 4410,3375 4715,3680 v1(5140,3680) ; v1(5698.43,2103.83) 5805,1997.26 v3@5805,1180
VINN: C18.1 J1.6 R19.2 R20.2 U4.15 | length 1954.4
  Top Layer w20: U4.15@4050.16,2848.27 4050.16,2635 R19.2@4108.5,2635 R20.2@4108.5,2570
  Bottom Layer w10: J1.6@3155,3762.46 3155,3280 3570,2865 3700,2865 3864.91,2700.09 v1(4050.09,2700.09)
VINP: J1.5 R5.1 R21.1 U4.16 | length 1772.7
  Top Layer w10: U4.16@4049.76,2874.25 4100.68,2874.25 4106.54,2868.39 R5.1@4106.54,2775 4106.54,2715.86 R21.1@4112.4,2710
  Bottom Layer w10: J1.5@3265,3762.93 3265,3214.64 3589.64,2890 3790,2890 3858.21,2821.79 v1(4106.62,2821.79)
VREFP: C29.2 C30.2 U6.24 | length 235.3
  Top Layer w10: U6.24@3413.62,2160.94 3414.13,2160.43 3477.01,2160.43 C29.2@3552.44,2085 C30.2@3552.44,2020
pads on no net: SW1.1 U3.5 U4.1 U4.17 U4.26 U4.27 U4.28 U5.4 U6.27 U6.29 U6.37 U6.61 U6.62 U6.63 U6.64 U10.5 VR1.3

## Polygon pours and split planes (outlines as drawn)
GND on GND "GND_L02_P003" (solid, pour order 3): 2000,4170 7020,4170 7020,985 2000,985
GND on Top Layer "GND_L01_P002" (solid, pour order 2): 2000,4170 7020,4170 7020,985 2000,985
GND on Bottom Layer "GND_L04_P004" (solid, pour order 4): 2000,4170 7020,4170 7020,985 2000,985
3V3 on VCC "3V3_L03_P005" (solid, pour order 5): 2000,4170 7020,4170 7020,985 2000,985

## Silkscreen, mask and mechanical layers (free items; w line width, h text height)
Top Overlay:
  text "GND" at 2370,3965 h60
  text "PA1 OUT" at 4885,3895 h40 r90
  text "DDS OUT" at 4225,3885 h40 r90
  text "PA2 OUT" at 5740,3885 h40 r90
  text "3.7V" at 5155,3810 h40
  text "12.0V" at 5380,3810 h40
  text "DDS POUT" at 3835,3675 h40
  text "D7" at 3380,3650 h40 r90
  text "GND" at 2775,3615 h40 r90
  text "RST" at 3480,3615 h40 r90
  text "+3.3V" at 2360,3605 h60
  text "VINP" at 3275,3590 h40 r90
  text "VINN" at 3175.4,3588.33 h40 r90
  text "FQUD" at 3575,3585 h40 r90
  text "WCLK" at 3680,3585 h40 r90
  text "BYP" at 5285,3550 h40
  text "QOUTB" at 3080,3540 h40 r90
  text "RF OUT+" at 6745,3510 h40
  text "PA1 VDD" at 2980,3455 h40 r90
  text "PA2 VDD" at 2880,3450 h40 r90
  text "GND" at 2455,3240 h40
  text "GND" at 2455,3140 h40
  text "UART TX" at 2455,3045 h40
  text "RST" at 2470,2945 h40
  text "GATE" at 4980,2860 h40
  text "SWCLK" at 2465,2845 h40
  text "SWDIO" at 2465,2745 h40
  text "+12V" at 2460,2645 h40
  text "+5V" at 2455,2545 h40
  text "GND" at 4995,2540 h40
  text "+3.3V" at 2450,2445 h40
  text "+3.7V" at 2460,2340 h40
  text "RF OUT-" at 6710,2305 h40
  text "PWR ON" at 5055,2050 h40
  text "GND" at 6760,1930 h60
  text "SCK" at 3490,1435 h40 r90
  text "GND" at 2885,1430 h40 r90
  text "PWDN" at 3085,1430 h40 r90
  text "RST" at 3185,1430 h40 r90
  text "DRDY" at 3285,1430 h40 r90
  text "MISO" at 3385,1430 h40 r90
  text "CS" at 3585,1430 h40 r90
  text "MOSI" at 3685,1430 h40 r90
  text "GND" at 2785,1425 h40 r90
  text "START" at 2986.08,1425.36 h40 r90
  text "+5V" at 6755,1360 h60
  text "+12V" at 6210,1345 h60
  text "+3.7V" at 5645,1330 h60
  text "DTCP Power + EMG v1.0" at 3860,1215 h80
  text "Authors: J. Dados, L. Wong, D. Stavskyi" at 3865,1068.33 h40
Mechanical 1:
  the board outline again, w0

## Text inside footprints (layer, text, board x,y; h text height)
U1: Top 3D Body "*" at 3141.5,3044.5 h50; Top Overlay "*" at 3091,3089.58 h50